# Altium PCB Fuente DC-DC FutBot.PcbDoc
Units mm, origin at the board's own origin, x right, y up, seen from the top; angles counter-clockwise.
Board outline 85.7 x 85.7 mm, 2 copper layers (Top Layer, Bottom Layer); 34 components, 22 nets, 93 pads, 0 vias.
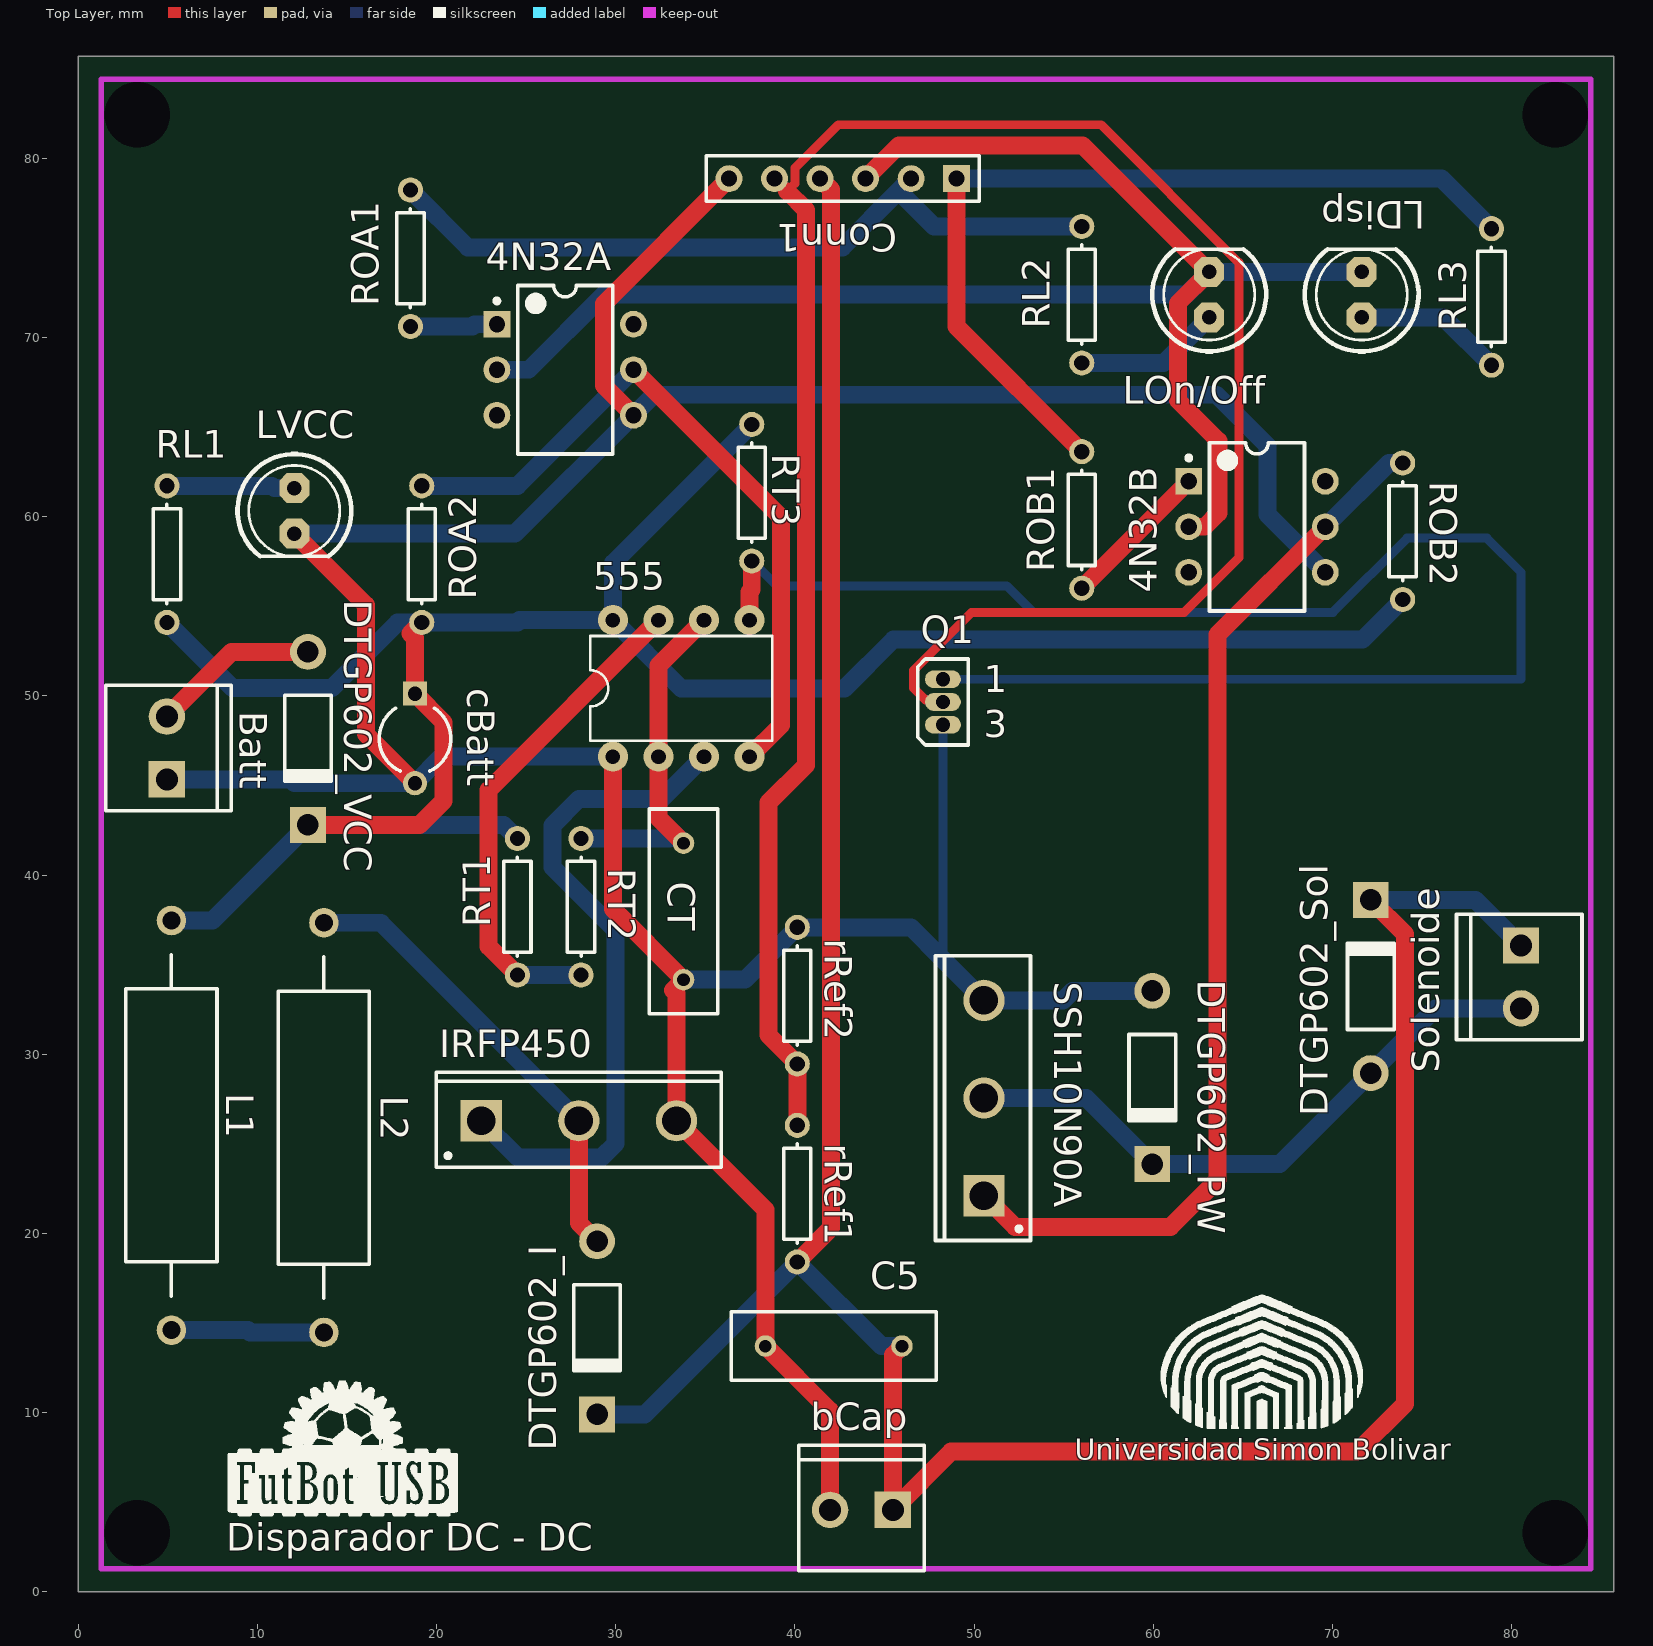
[diagram p0: Top Layer view]
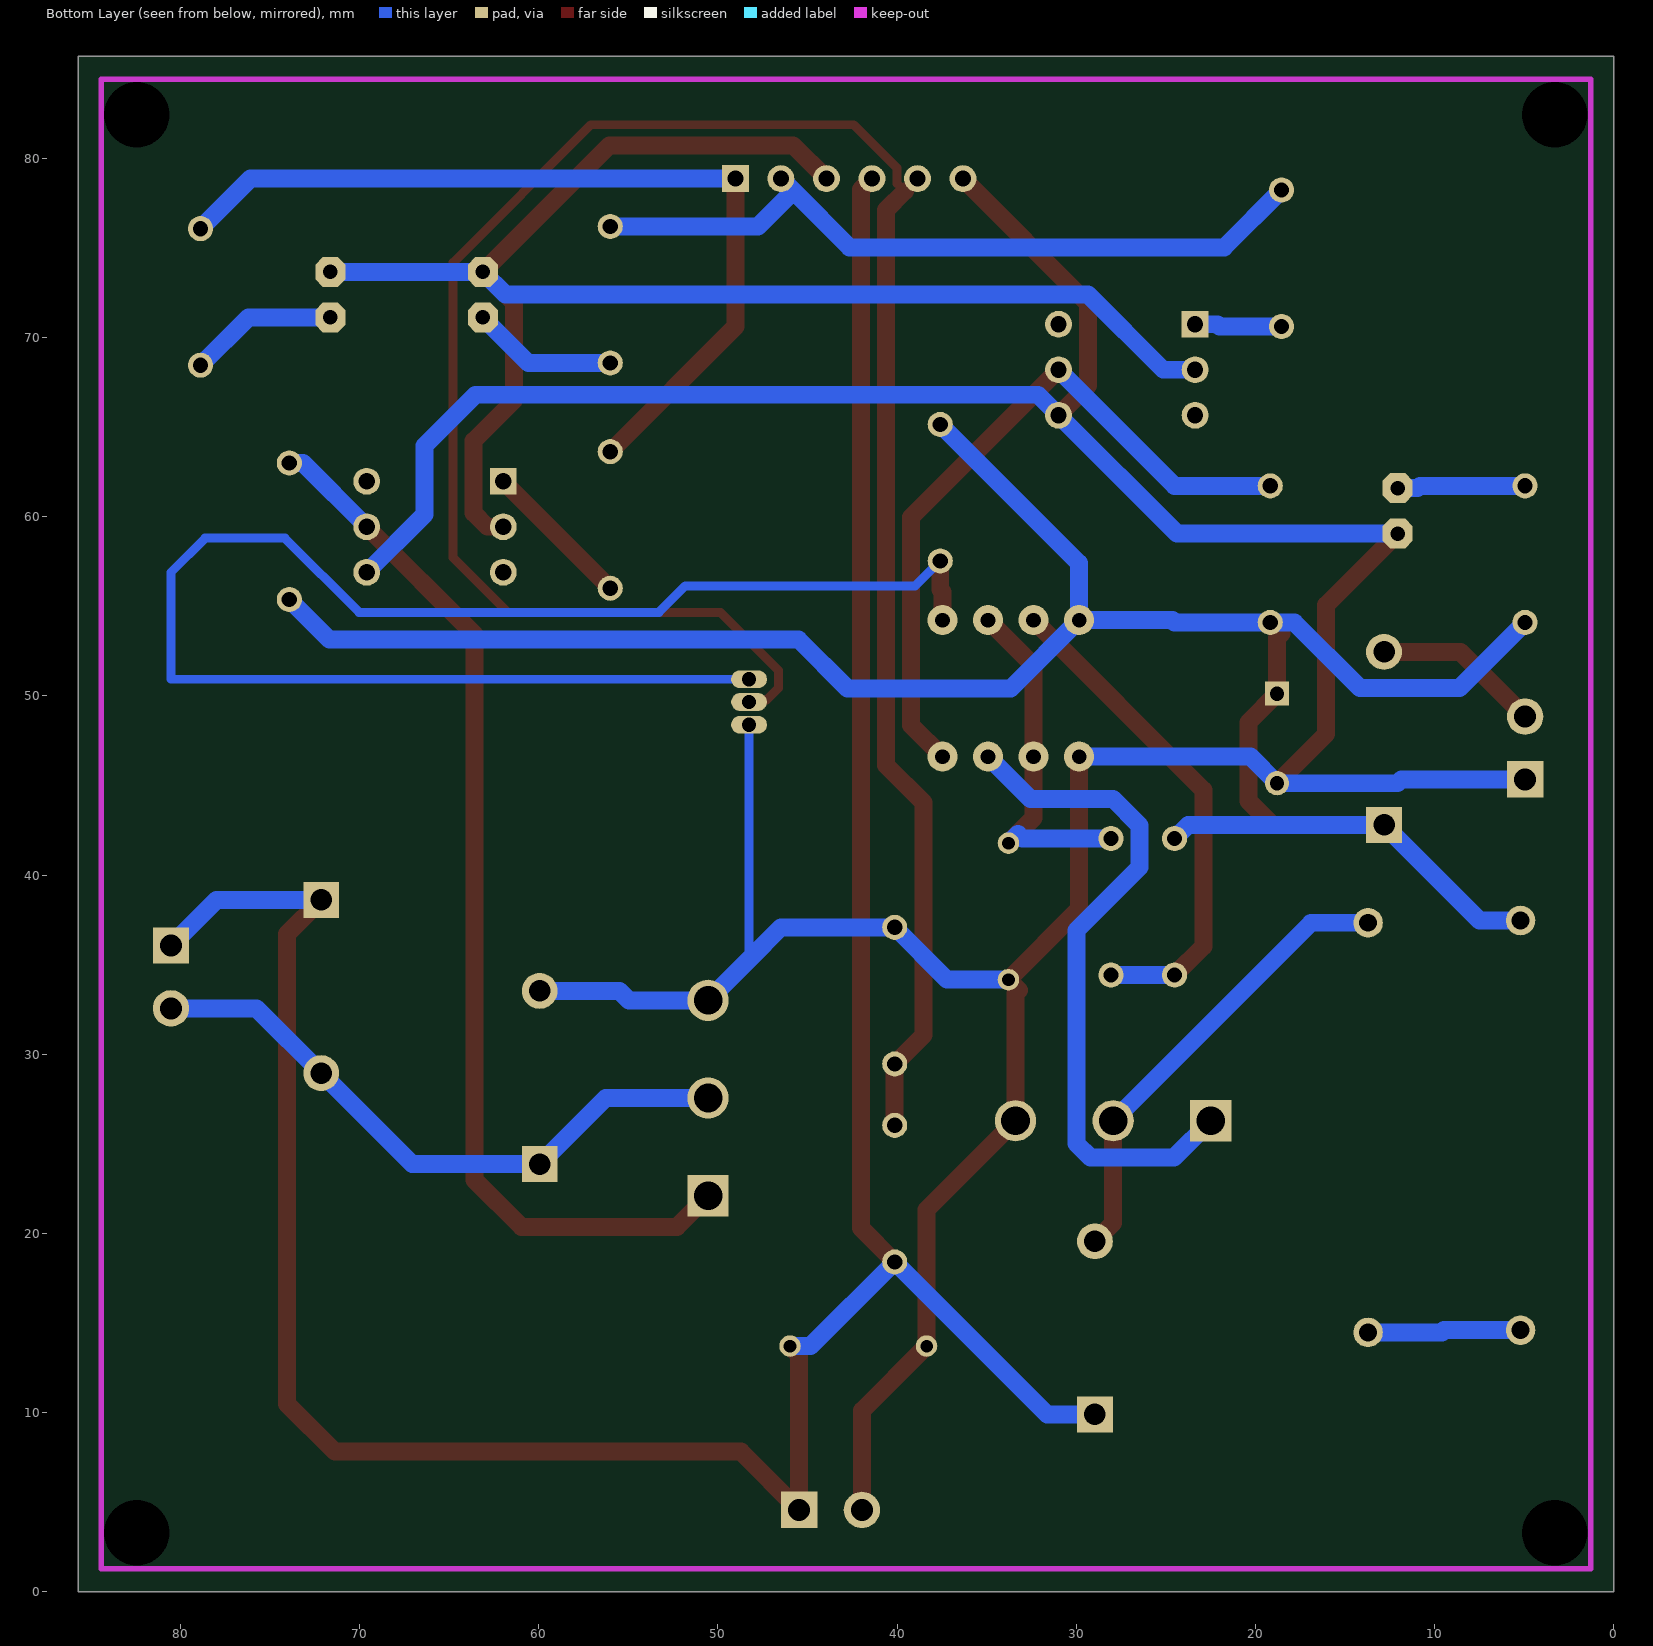
[diagram p1: Bottom Layer view, seen from below]

## Layer stack, top to bottom
Top Solder: solder mask 0.0102, Solder Resist, Dk 3.5
Top Layer: signal copper 0.0356
Dielectric 1: dielectric 0.32, FR-4, Dk 4.8
Bottom Layer: signal copper 0.0356
Bottom Solder: solder mask 0.0102, Solder Resist, Dk 3.5

## Board outline
0,0 85.7,0 85.7,85.7 0,85.7

## Design rules (kind name [scope] priority, off if disabled: settings)
Clearance Clearance_1 [All] p1: gap=0.4
Clearance [All] p2: gap=1
PolygonConnect [All] p1: connectstyle=Relief reliefconductorwidth=0.254 reliefentries=4 polygonreliefangle="90 Angle" airgapwidth=0.254
RoomDefinition "Fuente DC-DC FutBot" [InComponentClass('Fuente DC-DC FutBot')] p1: confinementstyle=ConfineIn formatcopy=TRUE lockcomponents=FALSE outline -50.8,-76.2 0,-76.2 0,-50.8 -50.8,-50.8
RoutingLayers RoutingLayers_1 [All] p1: top layer_v5=TRUE bottom layer_v5=TRUE
RoutingLayers [OnLayer('Bottom Layer')] p2: top layer_v5=FALSE bottom layer_v5=TRUE
RoutingVias [All] p1: holewidth=0.8 width=1.6 viastyle="Through Hole" minholewidth=0.711 minwidth=1.27 maxholewidth=0.711 maxwidth=1.27
SolderMaskExpansion [All] p1: expansion=0.102
UnpouredPolygon [All] p1: allowunpoured=FALSE
Width [All] p1: maxlimit=2 minlimit=0.5 preferedwidth=1
28 further rules are at their usual default settings.

## Components (designator, comment, footprint, x,y, rotation, side; value= is the part's Value field where it differs from the comment)
4N32A "4N32" DIP-6 27.178,68.199 r0 top
4N32B "4N32" DIP-6 65.786,59.436 r0 top
555 "<b>TIMER</b> / Changed DIP package to have round (not oval) pin pads / <p>http://www.ladyada.net/library/pcb/eaglelibrary.html<p>" DIL08-ROUND 33.655,50.419 r0 top
Batt "Standard 2-pin 0.1\" header. Use with <br> / - straight break away headers ( PRT-00116)<br> / - right angle break away headers (PRT-00553)<br> / - swiss pins (PRT-00743)<br> / - machine pins (PRT-00117)<br> / - female headers (PRT-00115)<br><br> /  /  Molex polarized connector foot print use with: PRT-08233 with associated crimp pins and housings.<br><br> /  / 2.54_SCREWTERM for use with  PRT-10571.<br><br> /  / 3.5mm Screw Terminal footprints for  PRT-08084<br><br> /  / 5mm Screw Terminal footprints for use with PRT-08432" SCREWTERMINAL-3.5MM-2 4.953,45.339 r90 top
bCap "Standard 2-pin 0.1\" header. Use with <br> / - straight break away headers ( PRT-00116)<br> / - right angle break away headers (PRT-00553)<br> / - swiss pins (PRT-00743)<br> / - machine pins (PRT-00117)<br> / - female headers (PRT-00115)<br><br> /  /  Molex polarized connector foot print use with: PRT-08233 with associated crimp pins and housings.<br><br> /  / 2.54_SCREWTERM for use with  PRT-10571.<br><br> /  / 3.5mm Screw Terminal footprints for  PRT-08084<br><br> /  / 5mm Screw Terminal footprints for use with PRT-08432" SCREWTERMINAL-3.5MM-2 45.466,4.572 r180 top
C5 "Cap" RAD-0.3 42.164,13.716 r0 top
cBatt "Cap Pol1" CAPR5-4X5 18.796,47.625 r270 top
Conn1 "Header 6" HDR1X6 49.022,78.867 r180 top
CT "Cap" RAD-0.3 33.782,37.973 r90 top
DTGP602_I "DTGP602" SOD66 28.956,14.732 r270 top
DTGP602_PW "DTGP602" SOD66 59.944,28.702 r270 top
DTGP602_Sol "DTGP602" SOD66 72.136,33.782 r90 top
DTGP602_VCC "DTGP602" SOD66 12.827,47.625 r270 top
IRFP450 "IRFP450" TO-247 27.94,26.289 r0 top
L1 "Inductor Iron" AXIAL-0.9 5.207,26.035 r270 top
L2 "Inductor Iron" AXIAL-0.9 13.716,25.908 r90 top
LDisp "<b>LED</b><p> / <u>OSRAM</u>:<br> /  / - <u>CHIPLED</u><br> / LG R971, LG N971, LY N971, LG Q971, LY Q971, LO R971, LY R971 / LH N974, LH R974<br> / LS Q976, LO Q976, LY Q976<br> / LO Q996<br> /  /  / - <u>Hyper CHIPLED</u><br> / LW Q18S<br> / LB Q993, LB Q99A, LB R99A<br> /  / - <u>SideLED</u><br> / LS A670, LO A670, LY A670, LG A670, LP A670<br> / LB A673, LV A673, LT A673, LW A673<br> / LH A674<br> / LY A675<br> / LS A676, LA A676, LO A676, LY A676, LW A676<br> / LS A679, LY A679, LG A679<br> /  / -  <u>Hyper Micro SIDELED®</u><br> / LS Y876, LA Y876, LO Y876, LY Y876<br> / LT Y87S<br> /  / - <u>SmartLED</u><br> / LW L88C, LW L88S<br> / LB L89C, LB L89S, LG L890<br> / LS L89K, LO L89K, LY L89K<br> / LS L896, LA L896, LO L896, LY L896<br> /  / - <u>TOPLED</u><br> / LS T670, LO T670, LY T670, LG T670, LP T670<br> / LSG T670, LSP T670, LSY T670, LOP T670, LYG T670<br> / LG T671, LOG T671, LSG T671<br> / LB T673, LV T673, LT T673, LW T673<br> / LH T674<br> / LS T676, LA T676, LO T676, LY T676, LB T676, LH T676, LSB T676, LW T676<br> / LB T67C, LV T67C, LT T67C, LS T67K, LO T67K, LY T67K, LW E67C<br> / LS E67B, LA E67B, LO E67B, LY E67B, LB E67C, LV E67C, LT E67C<br> / LW T67C<br> / LS T679, LY T679, LG T679<br> / LS T770, LO T770, LY T770, LG T770, LP T770<br> / LB T773, LV T773, LT T773, LW T773<br> / LH T774<br> / LS E675, LA E675, LY E675, LS T675<br> / LS T776, LA T776, LO T776, LY T776, LB T776<br> / LHGB T686<br> / LT T68C, LB T68C<br> /  / - <u>Hyper Mini TOPLED®</u><br> / LB M676<br> /  / - <u>Mini TOPLED Santana®</u><br> / LG M470<br> / LS M47K, LO M47K, LY M47K<br> /  / <p> / Source: http://www.osram.convergy.de/" LED5MM 71.628,72.39 r90 top
LOn/Off "<b>LED</b><p> / <u>OSRAM</u>:<br> /  / - <u>CHIPLED</u><br> / LG R971, LG N971, LY N971, LG Q971, LY Q971, LO R971, LY R971 / LH N974, LH R974<br> / LS Q976, LO Q976, LY Q976<br> / LO Q996<br> /  /  / - <u>Hyper CHIPLED</u><br> / LW Q18S<br> / LB Q993, LB Q99A, LB R99A<br> /  / - <u>SideLED</u><br> / LS A670, LO A670, LY A670, LG A670, LP A670<br> / LB A673, LV A673, LT A673, LW A673<br> / LH A674<br> / LY A675<br> / LS A676, LA A676, LO A676, LY A676, LW A676<br> / LS A679, LY A679, LG A679<br> /  / -  <u>Hyper Micro SIDELED®</u><br> / LS Y876, LA Y876, LO Y876, LY Y876<br> / LT Y87S<br> /  / - <u>SmartLED</u><br> / LW L88C, LW L88S<br> / LB L89C, LB L89S, LG L890<br> / LS L89K, LO L89K, LY L89K<br> / LS L896, LA L896, LO L896, LY L896<br> /  / - <u>TOPLED</u><br> / LS T670, LO T670, LY T670, LG T670, LP T670<br> / LSG T670, LSP T670, LSY T670, LOP T670, LYG T670<br> / LG T671, LOG T671, LSG T671<br> / LB T673, LV T673, LT T673, LW T673<br> / LH T674<br> / LS T676, LA T676, LO T676, LY T676, LB T676, LH T676, LSB T676, LW T676<br> / LB T67C, LV T67C, LT T67C, LS T67K, LO T67K, LY T67K, LW E67C<br> / LS E67B, LA E67B, LO E67B, LY E67B, LB E67C, LV E67C, LT E67C<br> / LW T67C<br> / LS T679, LY T679, LG T679<br> / LS T770, LO T770, LY T770, LG T770, LP T770<br> / LB T773, LV T773, LT T773, LW T773<br> / LH T774<br> / LS E675, LA E675, LY E675, LS T675<br> / LS T776, LA T776, LO T776, LY T776, LB T776<br> / LHGB T686<br> / LT T68C, LB T68C<br> /  / - <u>Hyper Mini TOPLED®</u><br> / LB M676<br> /  / - <u>Mini TOPLED Santana®</u><br> / LG M470<br> / LS M47K, LO M47K, LY M47K<br> /  / <p> / Source: http://www.osram.convergy.de/" LED5MM 63.119,72.39 r90 top
LVCC "<b>LED</b><p> / <u>OSRAM</u>:<br> /  / - <u>CHIPLED</u><br> / LG R971, LG N971, LY N971, LG Q971, LY Q971, LO R971, LY R971 / LH N974, LH R974<br> / LS Q976, LO Q976, LY Q976<br> / LO Q996<br> /  /  / - <u>Hyper CHIPLED</u><br> / LW Q18S<br> / LB Q993, LB Q99A, LB R99A<br> /  / - <u>SideLED</u><br> / LS A670, LO A670, LY A670, LG A670, LP A670<br> / LB A673, LV A673, LT A673, LW A673<br> / LH A674<br> / LY A675<br> / LS A676, LA A676, LO A676, LY A676, LW A676<br> / LS A679, LY A679, LG A679<br> /  / -  <u>Hyper Micro SIDELED®</u><br> / LS Y876, LA Y876, LO Y876, LY Y876<br> / LT Y87S<br> /  / - <u>SmartLED</u><br> / LW L88C, LW L88S<br> / LB L89C, LB L89S, LG L890<br> / LS L89K, LO L89K, LY L89K<br> / LS L896, LA L896, LO L896, LY L896<br> /  / - <u>TOPLED</u><br> / LS T670, LO T670, LY T670, LG T670, LP T670<br> / LSG T670, LSP T670, LSY T670, LOP T670, LYG T670<br> / LG T671, LOG T671, LSG T671<br> / LB T673, LV T673, LT T673, LW T673<br> / LH T674<br> / LS T676, LA T676, LO T676, LY T676, LB T676, LH T676, LSB T676, LW T676<br> / LB T67C, LV T67C, LT T67C, LS T67K, LO T67K, LY T67K, LW E67C<br> / LS E67B, LA E67B, LO E67B, LY E67B, LB E67C, LV E67C, LT E67C<br> / LW T67C<br> / LS T679, LY T679, LG T679<br> / LS T770, LO T770, LY T770, LG T770, LP T770<br> / LB T773, LV T773, LT T773, LW T773<br> / LH T774<br> / LS E675, LA E675, LY E675, LS T675<br> / LS T776, LA T776, LO T776, LY T776, LB T776<br> / LHGB T686<br> / LT T68C, LB T68C<br> /  / - <u>Hyper Mini TOPLED®</u><br> / LB M676<br> /  / - <u>Mini TOPLED Santana®</u><br> / LG M470<br> / LS M47K, LO M47K, LY M47K<br> /  / <p> / Source: http://www.osram.convergy.de/" LED5MM 12.065,60.325 r270 top
Q1 "ZVP2106A" E3 48.26,49.657 r0 top
RL1 "Res1" AXIAL-0.3 4.953,57.912 r90 top
RL2 "Res1" AXIAL-0.3 56.007,72.39 r270 top
RL3 "Res1" AXIAL-0.3 78.867,72.263 r270 top
ROA1 "Res1" AXIAL-0.3 18.542,74.422 r90 top
ROA2 "Res1" AXIAL-0.3 19.177,57.912 r270 top
ROB1 "Res1" AXIAL-0.3 56.007,59.817 r90 top
ROB2 "Res1" AXIAL-0.3 73.914,59.182 r270 top
rRef1 "Res1" AXIAL-0.3 40.132,22.225 r270 top
rRef2 "Res1" AXIAL-0.3 40.132,33.274 r270 top
RT1 "Res1" AXIAL-0.3 24.511,38.227 r90 top
RT2 "Res1" AXIAL-0.3 28.067,38.227 r270 top
RT3 "Res1" AXIAL-0.3 37.592,61.341 r90 top
Solenoide "Standard 2-pin 0.1\" header. Use with <br> / - straight break away headers ( PRT-00116)<br> / - right angle break away headers (PRT-00553)<br> / - swiss pins (PRT-00743)<br> / - machine pins (PRT-00117)<br> / - female headers (PRT-00115)<br><br> /  /  Molex polarized connector foot print use with: PRT-08233 with associated crimp pins and housings.<br><br> /  / 2.54_SCREWTERM for use with  PRT-10571.<br><br> /  / 3.5mm Screw Terminal footprints for  PRT-08084<br><br> /  / 5mm Screw Terminal footprints for use with PRT-08432" SCREWTERMINAL-3.5MM-2 80.518,36.068 r270 top
SSH10N90A "SSH10N90A" TO-247 50.546,27.559 r90 top

## Footprints (in the part's own frame and the unit in brackets; to place one, negate y for a bottom-side part, rotate by r counter-clockwise, add the part's x,y. Pads: shape width x height; smd on the part's side, far side on the other; paste and mask are expansions set on the pad)
AXIAL-0.3 [mm] "Axial Device, Thru-Hole; 2 Leads; 0.3 in Pin Spacing"
  round 1.4 hole 0.85: 1(-3.81,0) 2(3.81,0)
  silkscreen extent -2.77,-0.76 2.77,0.76
AXIAL-0.9 [mm] "Axial Device, Thru-Hole; 2 Leads; 0.9 in Pin Spacing"
  round 1.65 hole 1: 1(-11.43,0) 2(11.43,0)
  silkscreen extent -9.53,-2.54 9.53,2.54
CAPR5-4X5 [mm] "Capacitor; 2 Leads"
  rect 1.35x1.35 hole 0.8: 1(-2.5,0)
  round 1.35 hole 0.8: 2(2.5,0)
  silkscreen extent -1.69,-2 1.82,2
DIL08-ROUND [mil]
  round 66 hole 32: 1(-150,-150) 2(-50,-150) 3(50,-150) 4(150,-150) 5(150,150) 6(50,150) 7(-50,150) 8(-150,150)
  silkscreen extent -200,-115 200,115
DIP-6 [mm] "DIP; 6 Leads; Row Spacing 7.62 mm; Pitch 2.54 mm"
  rect 1.5x1.5 hole 0.9: 1(-3.81,2.54)
  round 1.5 hole 0.9: 2(-3.81,0) 3(-3.81,-2.54) 4(3.81,-2.54) 5(3.81,0) 6(3.81,2.54)
  silkscreen extent -3.93,-4.7 2.65,4.7, body extent -3.55,-4.7 3.55,4.7, height 5.46
E3 [mm] "TO, Flat Index; 3 In-Line, Axial Leads; Body Dia. 4.6mm; Lead Dia. 0.5 mm (max)"
  oval 2x1 hole 0.8: 1(0,1.27) 2(0,0) 3(0,-1.27)
  silkscreen extent -1.41,-2.41 1.41,2.41
HDR1X6 [mm] "Connector; Header; 6 Position"
  rect 1.5x1.5 hole 0.9: 1(0,0)
  round 1.5 hole 0.9: 2(2.54,0) 3(5.08,0) 4(7.62,0) 5(10.16,0) 6(12.7,0)
  silkscreen extent -1.27,-1.27 13.97,1.27
LED5MM [mil]
  oct 66x66 hole 32: A(-50,0) K(50,0)
  silkscreen extent -125,-125 100,125
RAD-0.3 [mm] "Radial Cap, Thru-Hole; 2 Leads; 0.3 in Pin Spacing"
  round 1.2 hole 0.7: 1(-3.81,0) 2(3.81,0)
  silkscreen extent -5.71,-1.91 5.71,1.91
SCREWTERMINAL-3.5MM-2 [mil]
  rect 80x80 hole 48: 1(0,0)
  round 80 hole 48: 2(138,0)
  silkscreen extent -69,-142 207,134
SOD66 [mm] "Diode, Axial; Body 4.8 x 2.6 mm (LxDia. max), Lead Dia. 0.81 mm (max)"
  round 2 hole 1.2: 1(-4.83,0)
  rect 2x2 hole 1.2: 2(4.83,0)
  silkscreen extent -2.4,-1.3 2.5,1.3
TO-247 [mm] "SIP with Mounting Hole; 3 Leads; Body 20 x 15.6 x 5 mm (typ); Pitch 5.45 mm"
  rect 2.3x2.3 hole 1.6: 1(-5.45,0)
  round 2.3 hole 1.6: 2(0,0) 3(5.45,0)
  silkscreen extent -7.95,-2.6 7.95,2.7, body extent -7.95,-2.6 7.95,2.7, height 24.6

## Part data
4N32A 4N32B: "Optocoupler"
555: library part *555N
Batt bCap Solenoide: library part M023.5MM
C5 CT: "Capacitor"
cBatt: "Polarized Capacitor (Radial)"
Conn1: "Header, 6-Pin"
DTGP602_I DTGP602_PW DTGP602_Sol DTGP602_VCC: "Diode SOD66 DO-41"
IRFP450: "N Power Mosfet"
L1 L2: "Magnetic-Core Inductor"
LDisp LOn/Off LVCC: library part LED5MM
Q1: "P-Channel Enhancement Mode Vertical DMOS FET"
RL1 RL2 RL3 ROA1 ROA2 ROB1 ROB2 rRef1 rRef2 RT1 RT2 RT3: "Resistor"
SSH10N90A: "N-CHANNEL POWER MOSFET"

## Free pads (board coordinates)
  round 1.524 hole 3.67: 0(82.423,82.423) 1(82.423,3.302) 2(3.302,3.302) 3(3.302,82.423)

## Nets (pads, with @x,y where several pads share a name; then routed paths per layer and width w, separated by ;. In a path a pad name is that pad's centre, name@x,y a point inside that pad or via, vN(x,y) a via of type N, cw(c..) or ccw(c..) an arc to the next point about the centre after c; other vN are vias at no path point)
DIGBT: 4N32B.5 ROB2.1 SSH10N90A.1 | length 59.6
  Top Layer w1: SSH10N90A.1 52.284,20.371 60.96,20.371 63.576,22.987 63.576,53.416 4N32B.5
  Bottom Layer w1: 4N32B.5 73.152,62.992 ROB2.1
DISP: Conn1.1 RL3.1 ROB1.2 | length 49.1
  Top Layer w1: Conn1.1 49.022,70.612 ROB1.2
  Bottom Layer w1: Conn1.1 76.073,78.867 RL3.1
GND: 4N32A.4 4N32B.4 555.1 Batt.1 bCap.2 C5.1 cBatt.2 Conn1.6 CT.1 DTGP602_PW.1 IRFP450.3 LVCC.K Q1.3 rRef2.1 SSH10N90A.3 | length 216.1
  Top Layer w1: LVCC.K 16.053,55.067 16.053,47.868 cBatt.2 ; 555.1 29.845,38.1 CT.1 33.192,33.573 33.39,33.376 IRFP450.3 38.354,21.325 C5.1 41.961,10.109 bCap.2 ; 4N32A.4 29.337,67.31 29.337,71.882 Conn1.6
  Bottom Layer w0.5: 48.26,35.295 Q1.3
  Bottom Layer w1: Batt.1 11.862,45.339 12.076,45.125 cBatt.2 20.28,46.609 555.1 ; LVCC.K 24.384,59.055 4N32A.4 32.131,66.802 63.525,66.802 66.37,63.957 66.37,60.122 4N32B.4 ; CT.1 37.211,34.163 rRef2.1 46.471,37.084 48.26,35.295 SSH10N90A.3 54.966,33.009 55.489,33.532 DTGP602_PW.1
GND_D: 4N32A.2 4N32B.2 Conn1.3 LDisp.K LOn/Off.K | length 90.5
  Top Layer w1: Conn1.3 45.796,80.721 56.058,80.721 LOn/Off.K 61.366,71.907 61.366,66.497 63.627,64.237 63.627,60.198 62.865,59.436 4N32B.2
  Bottom Layer w1: 4N32A.2 25.146,68.199 29.337,72.39 61.849,72.39 LOn/Off.K LDisp.K
Net4N32A_1: 4N32A.1 ROA1.1 | length 4.9
  Bottom Layer w1: ROA1.1 21.996,70.612 22.123,70.739 4N32A.1
Net4N32B_1: 4N32B.1 ROB1.1 | length 8.4
  Top Layer w1: ROB1.1 4N32B.1
Net555_2: 555.2 555.6 CT.2 RT2.1 | length 20.1
  Top Layer w1: CT.2 32.385,43.18 555.2 32.385,51.689 555.6
  Bottom Layer w1: RT2.1 32.995,42.037 33.261,42.304 CT.2
Net555_5: 555.5 Q1.1 RT3.1 | length 88.2
  Top Layer w1: 555.5 37.465,55.804 37.592,55.931 RT3.1
  Bottom Layer w0.5: RT3.1 38.989,56.134 51.816,56.134 53.293,54.657 70.024,54.657 74.168,58.801 78.613,58.801 80.518,56.896 80.518,50.927 Q1.1
Net555_7: 555.7 RT1.1 RT2.2 | length 28
  Top Layer w1: RT1.1 22.911,36.017 22.911,44.755 555.7
  Bottom Layer w1: RT1.1 RT2.2
NetBatt_2: Batt.2 DTGP602_VCC.1 | length 9.4
  Top Layer w1: Batt.2 8.564,52.455 DTGP602_VCC.1
NetDTGP602_I_1: DTGP602_I.1 IRFP450.2 L2.2 | length 25.9
  Top Layer w1: IRFP450.2 27.94,20.578 DTGP602_I.1
  Bottom Layer w1: L2.2 16.891,37.338 IRFP450.2
NetDTGP602_PW_2: DTGP602_PW.2 DTGP602_Sol.1 Solenoide.2 SSH10N90A.2 | length 35.1
  Bottom Layer w1: SSH10N90A.2 56.257,27.559 DTGP602_PW.2 67.056,23.872 DTGP602_Sol.1 75.747,32.563 Solenoide.2
NetL1_2: L1.2 L2.1 | length 8.6
  Bottom Layer w1: L1.2 9.474,14.605 9.601,14.478 L2.1
NetLDisp_A: LDisp.A RL3.2 | length 8.3
  Bottom Layer w1: LDisp.A 76.2,71.12 RL3.2
NetLOn/Off_A: LOn/Off.A RL2.2 | length 8.2
  Bottom Layer w1: RL2.2 60.579,68.58 LOn/Off.A
NetLVCC_A: LVCC.A RL1.2 | length 7.2
  Bottom Layer w1: RL1.2 10.82,61.722 10.947,61.595 LVCC.A
ON/OFF: Conn1.2 RL2.1 ROA1.2 | length 41.9
  Bottom Layer w1: ROA1.2 21.742,75.032 42.647,75.032 45.783,78.168 ; Conn1.2 45.783,78.168 ; RL2.1 47.752,76.2 45.783,78.168
SIN: 4N32A.5 555.4 ROA2.1 | length 40.2
  Top Layer w1: 4N32A.5 39.218,59.969 39.218,48.362 555.4
  Bottom Layer w1: ROA2.1 24.511,61.722 4N32A.5
TOUT: 555.3 IRFP450.1 | length 37.9
  Bottom Layer w1: IRFP450.1 24.547,24.232 29.21,24.232 29.997,25.019 29.997,36.906 26.467,40.437 26.467,42.774 27.94,44.247 32.563,44.247 555.3
VCAP: bCap.1 C5.2 Conn1.4 DTGP602_I.2 DTGP602_Sol.2 rRef1.2 Solenoide.1 | length 162.7
  Top Layer w1: rRef1.2 42.018,20.301 42.018,78.251 Conn1.4 ; C5.2 45.466,13.208 bCap.1 48.717,7.823 71.374,7.823 74.041,10.49 74.041,36.707 DTGP602_Sol.2
  Bottom Layer w1: DTGP602_I.2 31.619,9.902 rRef1.2 44.831,13.716 C5.2 ; DTGP602_Sol.2 77.974,38.612 Solenoide.1
VCC: 555.8 cBatt.1 DTGP602_VCC.2 L1.1 RL1.1 ROA2.2 ROB2.2 RT1.2 RT3.2 | length 130.7
  Top Layer w1: DTGP602_VCC.2 19.05,42.795 20.396,44.141 20.396,48.525 cBatt.1 18.796,53.238 18.555,53.48 ROA2.2
  Bottom Layer w1: RL1.1 8.611,50.444 14.173,50.444 17.831,54.102 ROA2.2 24.511,54.102 24.638,54.229 555.8 ; L1.1 7.497,37.465 DTGP602_VCC.2 23.753,42.795 RT1.2 ; RT3.2 29.845,57.404 555.8 ; ROB2.2 71.679,53.137 45.491,53.137 42.774,50.419 33.655,50.419 555.8
VREF: Conn1.5 Q1.2 rRef1.1 rRef2.2 | length 124.8
  Top Layer w0.5: 39.569,78.16 40.002,78.593 40.002,79.447 42.426,81.871 57.084,81.871 64.777,74.179 64.777,57.717 61.717,54.657 49.864,54.657 46.61,51.403 46.61,50.451 47.284,49.777 48.26,49.777 Q1.2
  Top Layer w1: 39.569,78.16 40.618,77.111 40.618,46.129 38.532,44.044 38.532,31.064 rRef2.2 rRef1.1
pads on no net: 4N32A.3 4N32A.6 4N32B.3 4N32B.6

## Keep-outs
Keep-Out Layer:
  lines w0.3: 1.3,1.3 1.3,84.4 84.4,84.4 84.4,1.3 1.3,1.3

## Silkscreen, mask and mechanical layers (free items; w line width, h text height)
Top Overlay:
  drawing of 5232 lines, arcs and shapes, not listed
  text "Universidad Simon Bolivar" at 55.626,6.985 h2
  text "Disparador DC - DC" at 8.255,2.286 h1.52

## Text inside footprints (layer, text, board x,y; h text height)
Q1: Top Overlay "1" at 50.535,50.212 h1.5; Top Overlay "3" at 50.535,47.694 h1.5